# EAGLE board LEDMatrix (EAGLE 9.6.2)
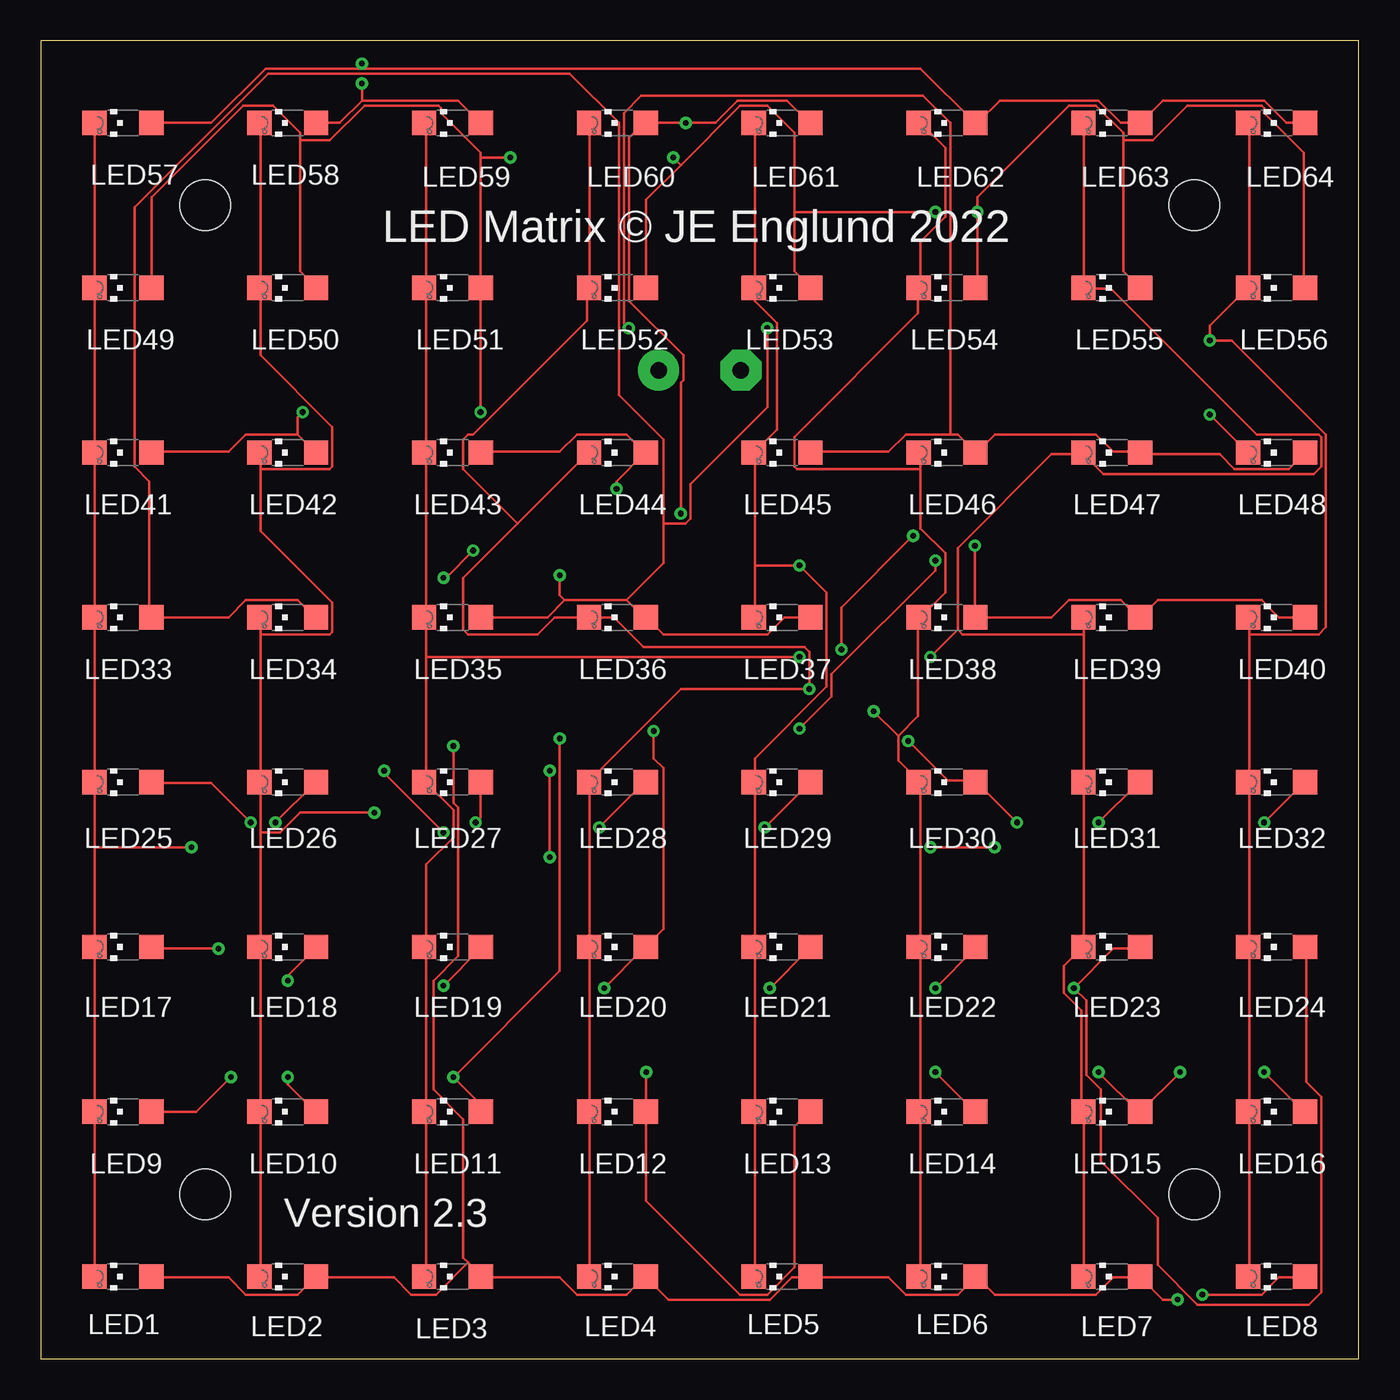
[diagram p0: board, top side]
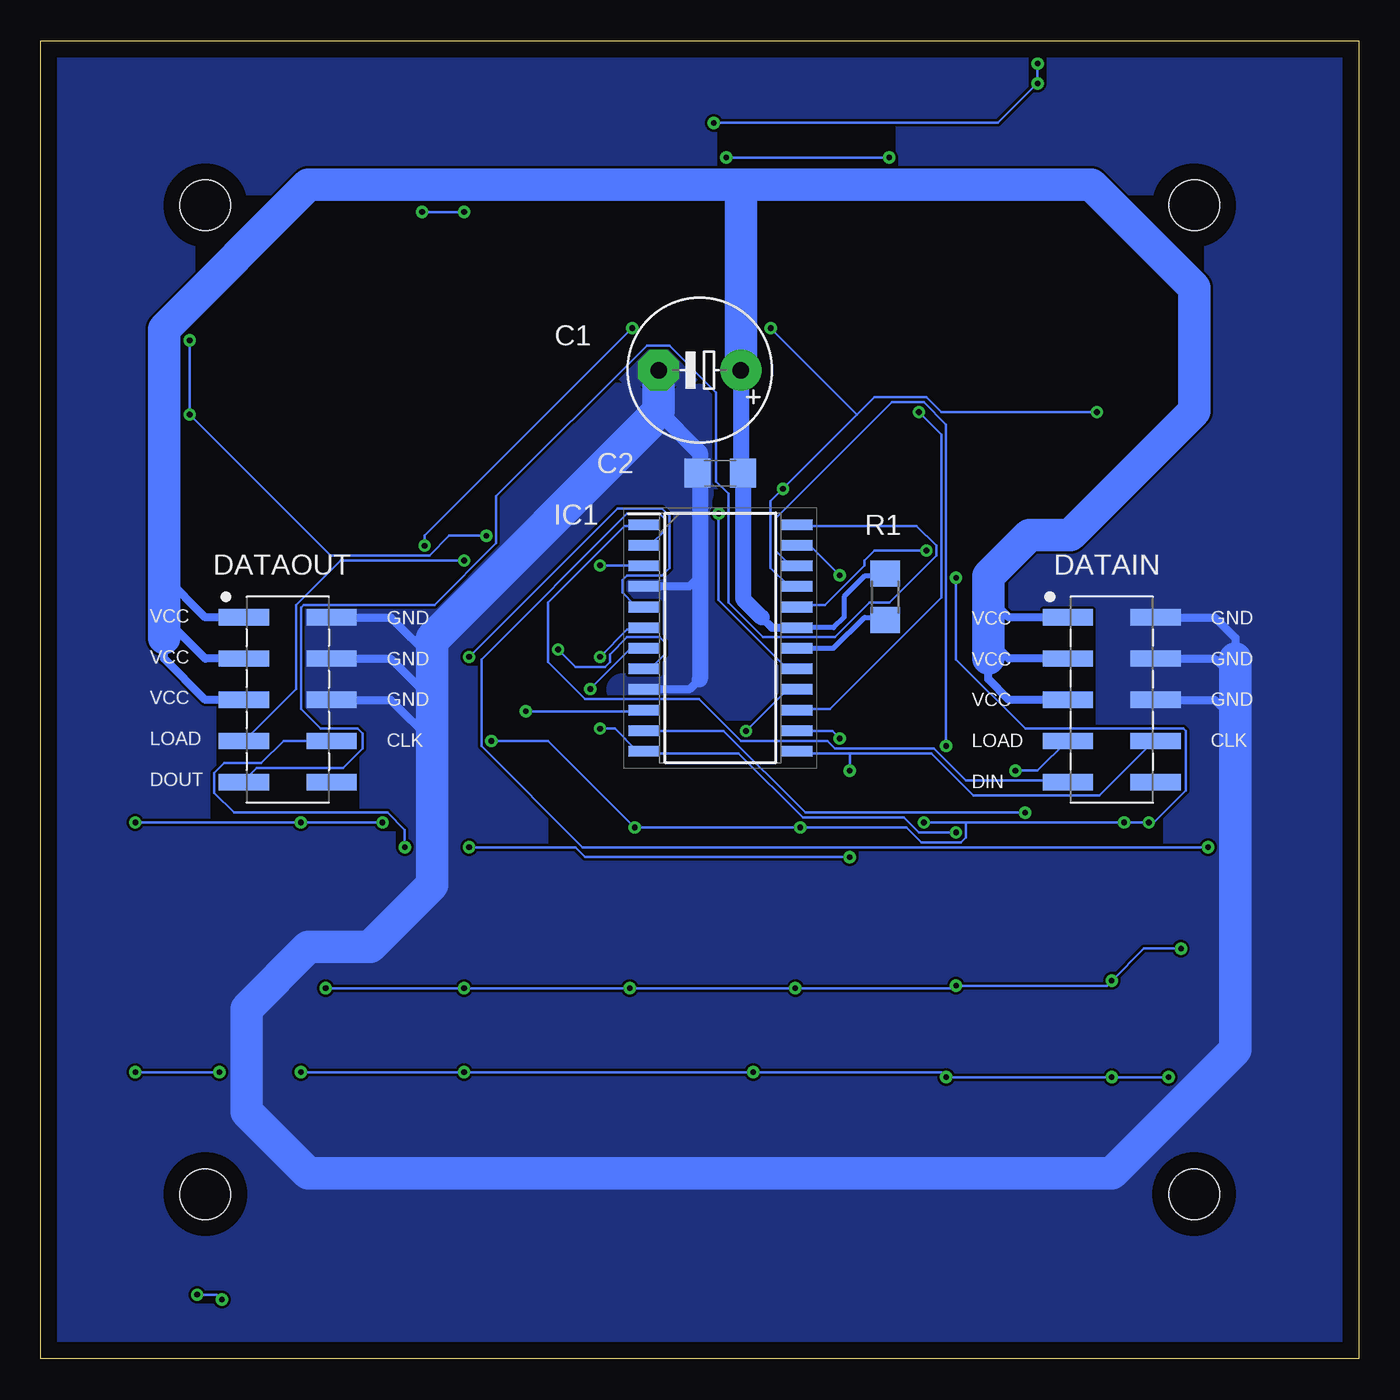
[diagram p1: board, bottom side, seen from below]

Size 81.28 x 81.28 mm. Coordinates in mm from the lower left corner, seen from the top.
Outline: 0,0 81.28,0 81.28,81.28 0,81.28 0,0
Copper layers (1*16): Top 0.035mm / dielectric 1.5mm / Bottom 0.035mm
Design rules "default *": minimum track width 6mil, minimum drill 0.35mm, track to track 6mil, track to pad 6mil, pad to pad 6mil, via to via 50mil, smd to smd 6mil, copper to edge 40mil, drill to drill 6mil, minimum pad ring 10mil, minimum via ring 8mil, stop-mask expansion 4mil, vias tented up to drill 0mil, thermal gap 10mil
Holes 3.1 mm at 10.16,71.12 71.12,71.12 71.12,10.16 10.16,10.16

## Footprints (pad centres in the part's own frame; a part is rotated, then mirrored left to right if it is on the bottom)
E5-8,5 = drill 1.016 pad 2.54: + -2.54,0 | drill 1.016 pad 2.54 octagon: - 2.54,0
C1206 = smd 1.6 x 1.8: 1 -1.4,0; 2 1.4,0
610X1021121 = smd 1 x 3.1: 1 -5.08,-2.7; 2 -2.54,-2.7; 3 0,-2.7; 4 2.54,-2.7; 5 5.08,-2.7; 6 5.08,2.7; 7 2.54,2.7; 8 0,2.7; 9 -2.54,2.7; 10 -5.08,2.7
SOIC127P1032X265-24N = smd 1.925 x 0.65: 1 -4.712,6.985; 2 -4.712,5.715; 3 -4.712,4.445; 4 -4.712,3.175; 5 -4.712,1.905; 6 -4.712,0.635; 7 -4.712,-0.635; 8 -4.712,-1.905; 9 -4.712,-3.175; 10 -4.712,-4.445; 11 -4.712,-5.715; 12 -4.712,-6.985; 13 4.712,-6.985; 14 4.712,-5.715; 15 4.712,-4.445; 16 4.712,-3.175; 17 4.712,-1.905; 18 4.712,-0.635; 19 4.712,0.635; 20 4.712,1.905; 21 4.712,3.175; 22 4.712,4.445; 23 4.712,5.715; 24 4.712,6.985
CHIPLED_1206 = smd 1.5 x 1.5: A 0,-1.75; C 0,1.75
R1206 = smd 1.6 x 1.803: 1 -1.422,0; 2 1.422,0

## Placement (x,y rotation side)
C1  10uF  [E5-8,5]  40.64,60.96 180 bottom
C2  100nF  [C1206]  39.37,54.61 180 bottom
DATAIN  2x5  [610X1021121]  15.24,40.64 270 bottom
DATAOUT  2x5  [610X1021121]  66.04,40.64 270 bottom
IC1  MAX7219CWG  [SOIC127P1032X265-24N]  39.37,44.45 0 bottom
LED1  SMT 1206  [CHIPLED_1206]  5.08,5.08 90 top
LED2  SMT 1206  [CHIPLED_1206]  15.24,5.08 90 top
LED3  SMT 1206  [CHIPLED_1206]  25.4,5.08 90 top
LED4  SMT 1206  [CHIPLED_1206]  35.56,5.08 90 top
LED5  SMT 1206  [CHIPLED_1206]  45.72,5.08 90 top
LED6  SMT 1206  [CHIPLED_1206]  55.88,5.08 90 top
LED7  SMT 1206  [CHIPLED_1206]  66.04,5.08 90 top
LED8  SMT 1206  [CHIPLED_1206]  76.2,5.08 90 top
LED9  SMT 1206  [CHIPLED_1206]  5.08,15.24 90 top
LED10  SMT 1206  [CHIPLED_1206]  15.24,15.24 90 top
LED11  SMT 1206  [CHIPLED_1206]  25.4,15.24 90 top
LED12  SMT 1206  [CHIPLED_1206]  35.56,15.24 90 top
LED13  SMT 1206  [CHIPLED_1206]  45.72,15.24 90 top
LED14  SMT 1206  [CHIPLED_1206]  55.88,15.24 90 top
LED15  SMT 1206  [CHIPLED_1206]  66.04,15.24 90 top
LED16  SMT 1206  [CHIPLED_1206]  76.2,15.24 90 top
LED17  SMT 1206  [CHIPLED_1206]  5.08,25.4 90 top
LED18  SMT 1206  [CHIPLED_1206]  15.24,25.4 90 top
LED19  SMT 1206  [CHIPLED_1206]  25.4,25.4 90 top
LED20  SMT 1206  [CHIPLED_1206]  35.56,25.4 90 top
LED21  SMT 1206  [CHIPLED_1206]  45.72,25.4 90 top
LED22  SMT 1206  [CHIPLED_1206]  55.88,25.4 90 top
LED23  SMT 1206  [CHIPLED_1206]  66.04,25.4 90 top
LED24  SMT 1206  [CHIPLED_1206]  76.2,25.4 90 top
LED25  SMT 1206  [CHIPLED_1206]  5.08,35.56 90 top
LED26  SMT 1206  [CHIPLED_1206]  15.24,35.56 90 top
LED27  SMT 1206  [CHIPLED_1206]  25.4,35.56 90 top
LED28  SMT 1206  [CHIPLED_1206]  35.56,35.56 90 top
LED29  SMT 1206  [CHIPLED_1206]  45.72,35.56 90 top
LED30  SMT 1206  [CHIPLED_1206]  55.88,35.56 90 top
LED31  SMT 1206  [CHIPLED_1206]  66.04,35.56 90 top
LED32  SMT 1206  [CHIPLED_1206]  76.2,35.56 90 top
LED33  SMT 1206  [CHIPLED_1206]  5.08,45.72 90 top
LED34  SMT 1206  [CHIPLED_1206]  15.24,45.72 90 top
LED35  SMT 1206  [CHIPLED_1206]  25.4,45.72 90 top
LED36  SMT 1206  [CHIPLED_1206]  35.56,45.72 90 top
LED37  SMT 1206  [CHIPLED_1206]  45.72,45.72 90 top
LED38  SMT 1206  [CHIPLED_1206]  55.88,45.72 90 top
LED39  SMT 1206  [CHIPLED_1206]  66.04,45.72 90 top
LED40  SMT 1206  [CHIPLED_1206]  76.2,45.72 90 top
LED41  SMT 1206  [CHIPLED_1206]  5.08,55.88 90 top
LED42  SMT 1206  [CHIPLED_1206]  15.24,55.88 90 top
LED43  SMT 1206  [CHIPLED_1206]  25.4,55.88 90 top
LED44  SMT 1206  [CHIPLED_1206]  35.56,55.88 90 top
LED45  SMT 1206  [CHIPLED_1206]  45.72,55.88 90 top
LED46  SMT 1206  [CHIPLED_1206]  55.88,55.88 90 top
LED47  SMT 1206  [CHIPLED_1206]  66.04,55.88 90 top
LED48  SMT 1206  [CHIPLED_1206]  76.2,55.88 90 top
LED49  SMT 1206  [CHIPLED_1206]  5.08,66.04 90 top
LED50  SMT 1206  [CHIPLED_1206]  15.24,66.04 90 top
LED51  SMT 1206  [CHIPLED_1206]  25.4,66.04 90 top
LED52  SMT 1206  [CHIPLED_1206]  35.56,66.04 90 top
LED53  SMT 1206  [CHIPLED_1206]  45.72,66.04 90 top
LED54  SMT 1206  [CHIPLED_1206]  55.88,66.04 90 top
LED55  SMT 1206  [CHIPLED_1206]  66.04,66.04 90 top
LED56  SMT 1206  [CHIPLED_1206]  76.2,66.04 90 top
LED57  SMT 1206  [CHIPLED_1206]  5.08,76.2 90 top
LED58  SMT 1206  [CHIPLED_1206]  15.24,76.2 90 top
LED59  SMT 1206  [CHIPLED_1206]  25.4,76.2 90 top
LED60  SMT 1206  [CHIPLED_1206]  35.56,76.2 90 top
LED61  SMT 1206  [CHIPLED_1206]  45.72,76.2 90 top
LED62  SMT 1206  [CHIPLED_1206]  55.88,76.2 90 top
LED63  SMT 1206  [CHIPLED_1206]  66.04,76.2 90 top
LED64  SMT 1206  [CHIPLED_1206]  76.2,76.2 90 top
R1  56k  [R1206]  29.21,46.99 90 bottom

## Library data of the parts
C1 = Clean-Kong
C2 = rcl; SPICEPREFIX: C
DATAIN DATAOUT = Wurth_Elektronik_Electromechanic_Board_to_Board_Connectors_rev16a
IC1 = MAX7219CWG; DESCRIPTION: IC DRVR 7 SEGMNT 8 DIGIT 24SOIC; HEIGHT: 2.65mm; MANUFACTURER_NAME: Maxim Integrated; MANUFACTURER_PART_NUMBER: MAX7219CWG
LED1-LED64 = led
R1 = rcl; SPICEPREFIX: R

## Nets
CLK: DATAIN.7 DATAOUT.7 IC1.13
DIG0: IC1.2 LED1.C LED9.C LED17.C LED25.C LED33.C LED41.C LED49.C LED57.C
DIG1: IC1.11 LED2.C LED10.C LED18.C LED26.C LED34.C LED42.C LED50.C LED58.C
DIG2: IC1.6 LED3.C LED11.C LED19.C LED27.C LED35.C LED43.C LED51.C LED59.C
DIG3: IC1.7 LED4.C LED12.C LED20.C LED28.C LED36.C LED44.C LED52.C LED60.C
DIG4: IC1.3 LED5.C LED13.C LED21.C LED29.C LED37.C LED45.C LED53.C LED61.C
DIG5: IC1.10 LED6.C LED14.C LED22.C LED30.C LED38.C LED46.C LED54.C LED62.C
DIG6: IC1.5 LED7.C LED15.C LED23.C LED31.C LED39.C LED47.C LED55.C LED63.C
DIG7: IC1.8 LED8.C LED16.C LED24.C LED32.C LED40.C LED48.C LED56.C LED64.C
DIN: DATAIN.5 IC1.1
DOUT: DATAOUT.5 IC1.24
GND: C1.- C2.2 DATAIN.8 DATAIN.9 DATAIN.10 DATAOUT.8 DATAOUT.9 DATAOUT.10 IC1.4 IC1.9
LOAD: DATAIN.4 DATAOUT.4 IC1.12
N$2: IC1.18 R1.1
SEGA: IC1.14 LED9.A LED10.A LED11.A LED12.A LED13.A LED14.A LED15.A LED16.A
SEGB: IC1.16 LED17.A LED18.A LED19.A LED20.A LED21.A LED22.A LED23.A LED24.A
SEGC: IC1.20 LED25.A LED26.A LED27.A LED28.A LED29.A LED30.A LED31.A LED32.A
SEGD: IC1.23 LED33.A LED34.A LED35.A LED36.A LED37.A LED38.A LED39.A LED40.A
SEGDP: IC1.22 LED1.A LED2.A LED3.A LED4.A LED5.A LED6.A LED7.A LED8.A
SEGE: IC1.21 LED41.A LED42.A LED43.A LED44.A LED45.A LED46.A LED47.A LED48.A
SEGF: IC1.15 LED49.A LED50.A LED51.A LED52.A LED53.A LED54.A LED55.A LED56.A
SEGG: IC1.17 LED57.A LED58.A LED59.A LED60.A LED61.A LED62.A LED63.A LED64.A
VCC: C1.+ C2.1 DATAIN.1 DATAIN.2 DATAIN.3 DATAOUT.1 DATAOUT.2 DATAOUT.3 IC1.19 R1.2

## Tracks (layer width: path | path; a pad name or v marks a point on that pad's centre or on a via)
CLK  (via drill 0.35)
  Top 0.152: v54.86,31.55 v58.83,31.55 | v31.39,36.27 v31.39,30.94
  Bottom 0.152: 31.39,37.34 26.36,37.34 23.77,34.75 16,34.75 12.65,38.1 DATAIN.7 | 31.39,37.34 34.59,37.34 IC1.13 | DATAOUT.7 66.29,38.1 67.67,36.73 69.95,36.73 70.56,36.12 70.56,34.9 69.34,33.68 59.89,33.68 58.83,32.61 v58.83,31.55 | v54.86,31.55 48.31,31.55 47.7,30.94 v31.39,30.94 | 31.39,37.34 v31.39,36.27
DIG0  (via drill 0.35)
  Top 0.152: LED57.C 3.35,76.2 3.35,66.14 LED49.C 3.35,65.99 3.35,55.93 LED41.C 3.35,55.78 3.35,45.72 | 3.35,15.24 3.35,5.18 LED1.C | 3.35,31.55 3.35,35.51 LED25.C 3.35,35.66 3.35,45.72 | 3.35,31.55 3.35,25.45 LED17.C 3.35,25.3 3.35,15.24 | 3.35,31.55 v9.3,31.55 | 3.35,15.24 LED9.C | 3.35,45.72 LED33.C
  Bottom 0.152: v9.3,31.55 47.85,31.55 54.1,37.8 54.1,43.13 45.11,52.12 43.13,52.12 42.82,51.82 42.82,51.05 43.59,50.29 44.04,50.29 IC1.2
DIG1  (via drill 0.35)
  Top 0.152: LED58.C 13.56,76.2 13.56,66.14 LED50.C 13.56,65.99 13.56,61.87 17.98,57.45 17.98,55.02 17.83,54.86 13.56,54.86 | 13.56,15.24 13.56,5.18 LED2.C | 13.56,32.46 13.56,35.51 LED26.C 13.56,35.66 13.56,44.65 | 13.56,32.46 13.56,25.45 LED18.C 13.56,25.3 13.56,15.24 | 13.56,44.65 13.56,45.72 LED34.C | 13.56,54.86 13.56,51.05 17.98,46.63 17.98,44.81 17.83,44.65 13.56,44.65 | 13.56,54.86 13.56,55.78 LED42.C | v20.57,33.68 16,33.68 14.78,32.46 13.56,32.46 | 13.56,15.24 LED10.C
  Bottom 0.152: v20.57,33.68 34.14,33.68 39.17,38.71 44.04,38.71 IC1.11
DIG2  (via drill 0.35)
  Top 0.152: LED59.C 23.77,76.2 23.77,66.14 LED51.C 23.77,65.99 23.77,55.93 LED43.C 23.77,55.78 23.77,45.72 | 23.77,15.24 23.77,5.18 LED3.C | 23.77,15.24 23.77,25.3 LED19.C 23.77,25.45 23.77,30.48 25.45,32.16 25.45,33.83 23.77,35.51 LED27.C 23.77,35.66 23.77,43.28 | 23.77,15.24 LED11.C | 23.77,45.72 23.77,43.28 | 23.77,43.28 v46.79,43.28 | 23.77,45.72 LED35.C
  Bottom 0.152: v46.79,43.28 45.11,44.96 44.2,44.96 IC1.6
DIG3  (via drill 0.35)
  Top 0.152: LED60.C 33.83,76.2 33.83,66.14 LED52.C 33.68,65.99 33.68,64.01 26.67,57 26.36,57 26.06,56.69 26.06,54.86 29.41,51.51 | 29.41,51.51 33.68,55.78 LED44.C | 29.41,51.51 26.06,48.16 26.06,44.96 26.36,44.65 30.63,44.65 31.7,45.72 LED36.C 35.36,45.72 37.19,43.89 47.09,43.89 47.4,43.59 v47.4,41.3 39.47,41.3 33.83,35.66 LED28.C 33.83,35.51 33.83,25.45 LED20.C 33.83,25.3 33.83,15.24 | 33.83,15.24 33.83,5.18 LED4.C | 33.83,15.24 LED12.C
  Bottom 0.152: v47.4,41.3 44.96,43.74 44.2,43.74 IC1.7
DIG4  (via drill 0.35)
  Top 0.152: 44.04,15.24 44.04,5.18 LED5.C | 44.04,15.24 44.04,25.3 LED21.C 44.04,25.45 44.04,35.51 LED29.C 44.04,35.66 44.04,37.03 48.46,41.45 48.46,47.24 v46.79,48.92 44.04,48.92 | 44.04,15.24 LED13.C | LED61.C 44.04,76.2 44.04,66.14 LED53.C 44.04,65.99 44.04,65.23 45.41,63.86 45.41,57.3 44.04,55.93 LED45.C 44.04,55.78 44.04,48.92 | 44.04,48.92 44.04,45.72 LED37.C
  Bottom 0.152: v46.79,48.92 44.2,48.92 IC1.3
DIG5  (via drill 0.35)
  Top 0.152: LED62.C 54.25,76.2 55.78,74.68 55.78,70.41 54.25,68.89 54.25,66.14 LED54.C 54.1,65.99 54.1,64.47 46.48,56.84 46.48,55.02 46.63,54.86 54.25,54.86 | 54.25,15.24 54.25,5.18 LED6.C | 52.88,38.41 54.1,39.62 54.1,45.72 LED38.C 54.25,45.72 55.78,47.24 55.78,49.68 54.25,51.21 54.25,54.86 | 52.88,38.41 52.88,36.88 54.1,35.66 LED30.C 54.25,35.51 54.25,25.45 LED22.C 54.25,25.3 54.25,15.24 | 54.25,54.86 54.25,55.78 LED46.C | 52.88,38.41 v51.36,39.93 | 54.25,15.24 LED14.C
  Bottom 0.152: v51.36,39.93 44.2,39.93 IC1.10
DIG6  (via drill 0.35)
  Top 0.152: LED63.C 64.31,76.2 64.31,66.14 LED55.C 64.31,65.99 65.99,65.99 74.98,57 78.79,57 78.94,56.84 78.94,55.02 78.49,54.56 65.53,54.56 64.31,55.78 LED47.C 64.16,55.78 62.33,55.78 56.54,49.99 56.54,44.96 | LED7.C 64.31,5.18 64.31,15.24 LED15.C 64.16,15.24 64.16,21.49 63.09,22.55 63.09,24.23 64.16,25.3 LED23.C 64.31,25.45 64.31,35.51 LED31.C 64.31,35.66 64.31,44.65 | 64.31,44.65 64.31,45.72 LED39.C | 56.54,44.96 56.84,44.65 64.31,44.65 | 56.54,44.96 v54.86,43.28
  Bottom 0.152: v54.86,43.28 45.72,52.43 42.98,52.43 42.52,51.97 42.52,48.77 42.98,48.31 45.11,48.31 45.41,48.01 45.41,47.24 44.65,46.48 44.2,46.48 IC1.5
DIG7  (via drill 0.35)
  Top 0.152: 74.52,15.24 74.52,5.18 LED8.C | 74.52,44.65 74.52,35.66 LED32.C 74.52,35.51 74.52,25.45 LED24.C 74.52,25.3 74.52,15.24 | 74.52,44.65 74.52,45.72 LED40.C | 74.52,15.24 LED16.C | v72.08,58.22 74.37,55.93 LED48.C | LED64.C 74.52,76.2 74.52,66.14 LED56.C 74.37,65.99 72.08,63.7 v72.08,62.79 73.46,62.79 79.25,57 79.25,45.11 78.79,44.65 74.52,44.65 | v49.38,43.74 49.38,46.33 v53.8,50.75
  Bottom 0.152: v72.08,62.79 v72.08,58.22 63.4,49.53 57.3,49.53 56.08,50.75 v53.8,50.75 | v49.38,43.74 48.31,42.67 46.48,42.67 46.18,42.98 46.18,43.43 45.11,44.5 43.13,44.5 42.82,44.2 42.82,43.43 43.59,42.67 44.04,42.67 IC1.8
DIN
  Bottom 0.152: IC1.1 44.2,51.36 45.26,51.36 49.99,46.63 49.99,42.98 47.7,40.69 40.69,40.69 38.1,38.1 32.77,38.1 32.31,37.64 26.21,37.64 24.23,35.66 17.98,35.66 DATAIN.5
DOUT
  Bottom 0.152: IC1.24 34.59,51.36 27.28,51.36 26.06,50.14 26.06,49.53 28.96,46.63 30.18,46.63 32.31,44.5 36.73,44.5 38.86,46.63 38.86,53.34 39.62,54.1 39.62,59.59 42.52,62.48 43.89,62.48 53.19,53.19 53.19,50.29 57,46.48 65.08,46.48 65.23,46.33 65.23,40.08 64.01,38.86 61.72,38.86 61.42,38.56 61.42,37.64 62.64,36.42 67.97,36.42 68.73,35.66 DATAOUT.5
GND
  Bottom 0.5: DATAIN.10 8.89,45.72 7.62,44.45 7.62,43.18 7.62,41.91 | 7.62,41.91 7.62,39.37 8.89,40.64 DATAIN.8 | 7.62,41.91 8.89,43.18 DATAIN.9 | C2.2 40.77,56.01 | 40.64,54.48 40.64,52.07 40.64,48.26 | 40.64,48.26 41.27,47.62 IC1.4 | 40.64,48.26 40.64,41.91 41.27,41.27 IC1.9 | DATAOUT.8 59.69,40.64 57.15,38.1 | 57.15,38.1 57.15,35.56 | DATAOUT.9 59.69,43.18 57.15,40.64 | 57.15,40.64 57.15,38.1 | DATAOUT.10 59.69,45.72 57.15,43.18 | 57.15,43.18 57.15,40.64 | 43.18,58.42 43.18,57.15 57.15,43.18
  Bottom 1: 43.18,58.42 40.77,56.01 40.64,55.88 40.64,52.07 40.64,41.91 | C2.2 40.64,54.48
  Bottom 2: C1.- 43.18,58.42 57.15,44.45 57.15,43.18 57.15,29.21 60.96,25.4 64.77,25.4 68.58,21.59 68.58,15.24 64.77,11.43 15.24,11.43 7.62,19.05 7.62,43.18
  pour Bottom: 0,81.28 81.28,81.28 81.28,0 0,0
LOAD  (via drill 0.35)
  Top 0.152: v24.84,32.46 21.18,36.12 v21.18,36.27 | v55.17,49.23 55.17,48.62 48.77,42.22 48.77,40.84 v46.79,38.86
  Bottom 0.152: v24.84,32.46 27.13,32.46 28.04,33.38 34.29,33.38 38.25,37.34 44.04,37.34 IC1.12 44.2,37.49 44.5,37.49 45.87,38.86 v46.79,38.86 | v21.18,36.27 19.81,36.27 17.98,38.1 DATAIN.4 | v55.17,49.23 62.79,49.23 65.53,46.48 65.53,41.3 DATAOUT.4
N$2
  Bottom 0.3: IC1.18 32.38,43.81 30.48,45.72 29.36,45.72 R1.1
SEGA  (via drill 0.35)
  Top 0.152: 37.34,15.24 37.34,9.75 43.13,3.96 44.81,3.96 46.48,5.64 46.48,14.33 47.4,15.24 LED13.A | LED9.A 9.6,15.24 v11.73,17.37 | v15.24,17.37 15.24,16.92 16.92,15.24 LED10.A | LED11.A 27.13,15.24 27.13,15.7 v25.45,17.37 32,23.93 v32,38.25 | v55.17,17.68 57.61,15.24 LED14.A | v65.23,17.68 67.67,15.24 LED15.A 67.82,15.24 v70.26,17.68 | v75.44,17.68 77.88,15.24 LED16.A | v37.34,17.68 37.34,15.24 | 37.34,15.24 LED12.A
  Bottom 0.152: v11.73,17.37 v15.24,17.37 v25.45,17.37 25.76,17.68 v37.34,17.68 v55.17,17.68 v65.23,17.68 | v70.26,17.68 v75.44,17.68 | v32,38.25 32.46,38.71 34.59,38.71 IC1.14
SEGB  (via drill 0.35)
  Top 0.152: v10.97,25.3 6.86,25.3 LED17.A | v15.24,23.32 15.24,23.62 16.92,25.3 LED18.A | v24.84,23.01 27.13,25.3 LED19.A | v34.75,22.86 37.19,25.3 LED20.A 37.34,25.45 38.41,26.52 38.41,36.42 37.8,37.03 v37.8,38.71 | v44.96,22.86 47.4,25.3 LED21.A | v55.17,22.86 57.61,25.3 LED22.A | LED23.A 67.67,25.3 66.14,25.3 v63.7,22.86 64.47,22.1 64.47,17.53 65.38,16.61 65.38,12.19 68.89,8.69 68.89,5.79 71.32,3.35 78.18,3.35 78.94,4.12 78.94,16.15 78.03,17.07 78.03,25.3 LED24.A
  Bottom 0.152: v10.97,25.3 13.26,25.3 v15.24,23.32 15.54,23.01 v24.84,23.01 24.99,22.86 v34.75,22.86 v44.96,22.86 v55.17,22.86 v63.7,22.86 | v37.8,38.71 35.36,41.15 34.75,41.15 IC1.16
SEGC  (via drill 0.35)
  Top 0.152: v12.95,33.07 10.52,35.51 6.86,35.51 LED25.A | v14.48,33.07 16.92,35.51 LED26.A | v26.82,33.07 27.13,33.38 27.13,35.51 LED27.A | v34.44,32.77 37.19,35.51 LED28.A | v44.65,32.77 47.4,35.51 LED29.A | v53.49,38.1 55.93,35.66 57.61,35.66 LED30.A 57.76,35.51 v60.2,33.07 | v65.23,33.07 67.67,35.51 LED31.A | v75.44,33.07 77.88,35.51 LED32.A | v26.67,49.84 24.99,48.16 v24.84,48.16
  Bottom 0.152: 24.23,33.07 v14.48,33.07 v12.95,33.07 12.65,33.07 10.67,35.05 10.67,38.71 10.82,38.86 20.57,38.86 24.84,43.13 v24.84,48.16 | 24.23,33.07 v26.82,33.07 | 24.23,33.07 24.23,32.16 24.54,31.85 26.98,31.85 27.89,32.77 v34.44,32.77 v44.65,32.77 49.99,38.1 v53.49,38.1 | v60.2,33.07 v65.23,33.07 v75.44,33.07 | v26.67,49.84 29.87,49.84 30.48,49.23 30.48,48.92 32.92,46.48 34.59,46.48 IC1.20
SEGD  (via drill 0.35)
  Top 0.152: LED40.A 76.35,45.72 75.29,46.79 68.89,46.79 67.82,45.72 LED39.A 67.67,45.72 66.6,46.79 63.4,46.79 62.33,45.72 LED38.A 57.61,45.72 v57.61,50.14 | LED34.A 16.92,45.72 15.85,46.79 12.65,46.79 11.58,45.72 LED33.A 6.71,45.72 6.71,54.1 5.79,55.02 5.79,71.02 14.02,79.25 32.61,79.25 35.66,76.2 35.66,59.44 38.41,56.69 38.41,51.51 | LED35.A 31.24,45.72 32.31,46.79 | 36.12,46.79 32.31,46.79 | 36.12,46.79 37.19,45.72 LED36.A 37.34,45.72 38.41,44.65 44.81,44.65 45.87,45.72 LED37.A | v32,48.31 32,47.09 32.31,46.79 | 38.41,51.51 38.41,49.07 36.12,46.79 | v44.81,63.55 44.81,58.67 40.08,53.95 40.08,51.82 39.78,51.51 38.41,51.51
  Bottom 0.152: v32,48.31 33.83,50.14 34.59,50.14 IC1.23 | v57.61,50.14 57.61,50.75 v44.81,63.55
SEGDP  (via drill 0.35)
  Top 0.152: v71.63,3.96 75.29,3.96 76.35,5.03 77.88,5.03 LED8.A | v70.1,3.66 69.19,3.66 67.82,5.03 LED7.A 67.67,5.03 66.14,5.03 65.08,3.96 58.83,3.96 57.76,5.03 LED6.A 57.61,5.03 56.54,3.96 53.34,3.96 52.27,5.03 47.55,5.03 LED5.A 47.4,5.03 46.33,5.03 44.96,3.66 38.71,3.66 37.34,5.03 LED4.A 37.19,5.03 36.12,3.96 33.07,3.96 32,5.03 27.28,5.03 LED3.A 27.13,5.18 26.36,5.94 | LED1.A 6.86,5.03 11.58,5.03 12.65,3.96 15.85,3.96 16.92,5.03 LED2.A 17.07,5.03 21.79,5.03 22.86,3.96 24.38,3.96 26.36,5.94 | v25.45,37.8 25.45,34.29 25.76,33.98 25.76,24.84 24.23,23.32 24.23,16.61 26.06,14.78 26.06,6.25 26.36,5.94
  Bottom 0.152: v71.63,3.96 70.41,3.96 v70.1,3.66 | v25.45,37.8 25.45,57.61 26.82,58.98 28.8,58.98 35.97,51.82 35.97,49.84 35.05,48.92 34.75,48.92 IC1.22
SEGE  (via drill 0.35)
  Top 0.152: LED48.A 77.88,55.78 76.96,54.86 73.61,54.86 72.69,55.78 67.82,55.78 LED47.A 67.67,55.93 66.14,55.93 65.08,57 58.83,57 57.76,55.93 LED46.A 57.61,55.93 56.54,57 56.08,57 | 56.08,57 53.34,57 52.27,55.93 47.55,55.93 LED45.A | 15.85,57 12.65,57 11.58,55.93 6.86,55.93 LED41.A | 15.85,57 16.92,55.93 LED42.A | LED43.A 27.28,55.93 32,55.93 33.07,57 36.12,57 37.19,55.93 LED44.A 37.19,55.78 35.51,54.1 v35.51,53.65 | 15.85,57 15.85,58.06 v16.15,58.37 | 56.08,57 56.08,76.2 54.41,77.88 37.03,77.88 35.97,76.81 35.97,63.86 v36.27,63.55
  Bottom 0.152: IC1.21 34.75,47.7 35.2,47.7 36.27,48.77 36.27,52.88 v35.51,53.65 30.94,58.22 | v16.15,58.37 25.76,58.37 26.67,59.28 29.87,59.28 30.94,58.22 | 30.94,58.22 v36.27,63.55
SEGF  (via drill 0.35)
  Top 0.152: 39.47,73.61 43.13,77.27 44.81,77.27 46.48,75.59 46.48,70.71 | 39.47,73.61 37.34,71.48 37.34,66.14 LED52.A | 46.48,70.71 46.48,67.06 47.4,66.14 LED53.A | 66.75,75.13 66.75,67.06 67.67,66.14 LED55.A | 66.75,75.13 66.75,75.59 65.08,77.27 63.4,77.27 57.76,71.63 v57.76,70.71 57.76,66.14 LED54.A | 66.75,75.13 68.58,75.13 70.71,77.27 75.29,77.27 75.44,77.11 75.44,76.81 77.88,74.37 77.88,66.14 LED56.A | v55.17,70.71 46.48,70.71 | 16,75.13 16,67.06 16.92,66.14 LED50.A | 16,75.13 16,75.59 14.33,77.27 12.5,77.27 6.86,71.63 6.86,66.14 LED49.A | 27.13,74.07 27.13,74.37 24.69,76.81 24.69,77.11 24.54,77.27 19.96,77.27 17.83,75.13 16,75.13 | 27.13,74.07 27.13,66.14 LED51.A 27.13,65.99 v27.13,58.37 | v39.01,74.07 39.47,73.61 | 27.13,74.07 v28.96,74.07
  Bottom 0.152: v57.76,70.71 v55.17,70.71 | v27.13,58.37 25.76,57 25.76,46.94 32.61,40.08 34.59,40.08 IC1.15 | v28.96,74.07 v39.01,74.07
SEGG  (via drill 0.35)
  Top 0.152: LED61.A 47.4,76.2 46.02,77.57 42.98,77.57 41.6,76.2 v39.78,76.2 LED60.A 37.19,76.2 36.27,75.29 36.27,65.23 39.62,61.87 39.62,60.35 39.47,60.2 v39.47,52.12 | LED58.A 18.44,76.2 19.81,77.57 | 19.81,77.57 25.76,77.57 27.13,76.2 LED59.A | LED57.A 10.52,76.2 13.87,79.55 19.81,79.55 | 19.81,79.55 54.25,79.55 57.61,76.2 LED62.A 57.76,76.2 59.13,77.57 65.23,77.57 66.6,76.2 LED63.A 67.82,76.2 69.19,77.57 75.44,77.57 76.81,76.2 LED64.A | v19.81,78.64 19.81,77.57 | 19.81,79.55 v19.81,79.86
  Bottom 0.152: v39.47,52.12 39.47,46.79 35.36,42.67 34.75,42.67 IC1.17 | v19.81,79.86 v19.81,78.64 22.25,76.2 v39.78,76.2
VCC
  Bottom 0.3: R1.2 29.36,48.26 30.48,48.26 31.75,46.99 31.75,45.72 32.38,45.09 IC1.19
  Bottom 0.5: 22.86,46.99 21.59,45.72 DATAIN.1 | DATAIN.2 21.59,43.18 22.86,44.45 | 22.86,44.45 22.86,46.99 | DATAIN.3 21.59,40.64 22.86,41.91 22.86,43.18 22.86,44.45 | IC1.19 36.2,45.09 36.83,45.72 | 22.86,46.99 22.86,48.26 | DATAOUT.1 71.12,45.72 73.66,48.26 73.66,45.72 | DATAOUT.2 71.12,43.18 73.66,45.72 | DATAOUT.3 71.12,40.64 73.66,43.18 73.66,44.45 73.66,45.72
  Bottom 1: C1.+ 38.1,54.74 C2.1 37.97,46.86 36.83,45.72
  Bottom 2: 73.66,44.45 73.66,63.5 64.77,72.39 38.1,72.39 | 38.1,72.39 16.51,72.39 10.16,66.04 10.16,58.42 17.78,50.8 20.32,50.8 22.86,48.26 22.86,43.18 | C1.+ 38.1,72.39

## Text on the board
tNames: LED Matrix © JE Englund 2022 | Version 2.3
bNames: GND / / GND / / GND / / CLK | GND / / GND / / GND / / CLK | VCC / / VCC / / VCC / / LOAD / / DIN | VCC / / VCC / / VCC / / LOAD / / DOUT